# Altium PCB PCB1.PcbDoc
Units mm, origin at the board's own origin, x right, y up, seen from the top; angles counter-clockwise.
Board outline 100 x 100 mm, 2 copper layers (Top Layer, Bottom Layer); 42 components, 8 nets, 132 pads, 2 vias.
Unrouted connection lines stored in the file: 118.
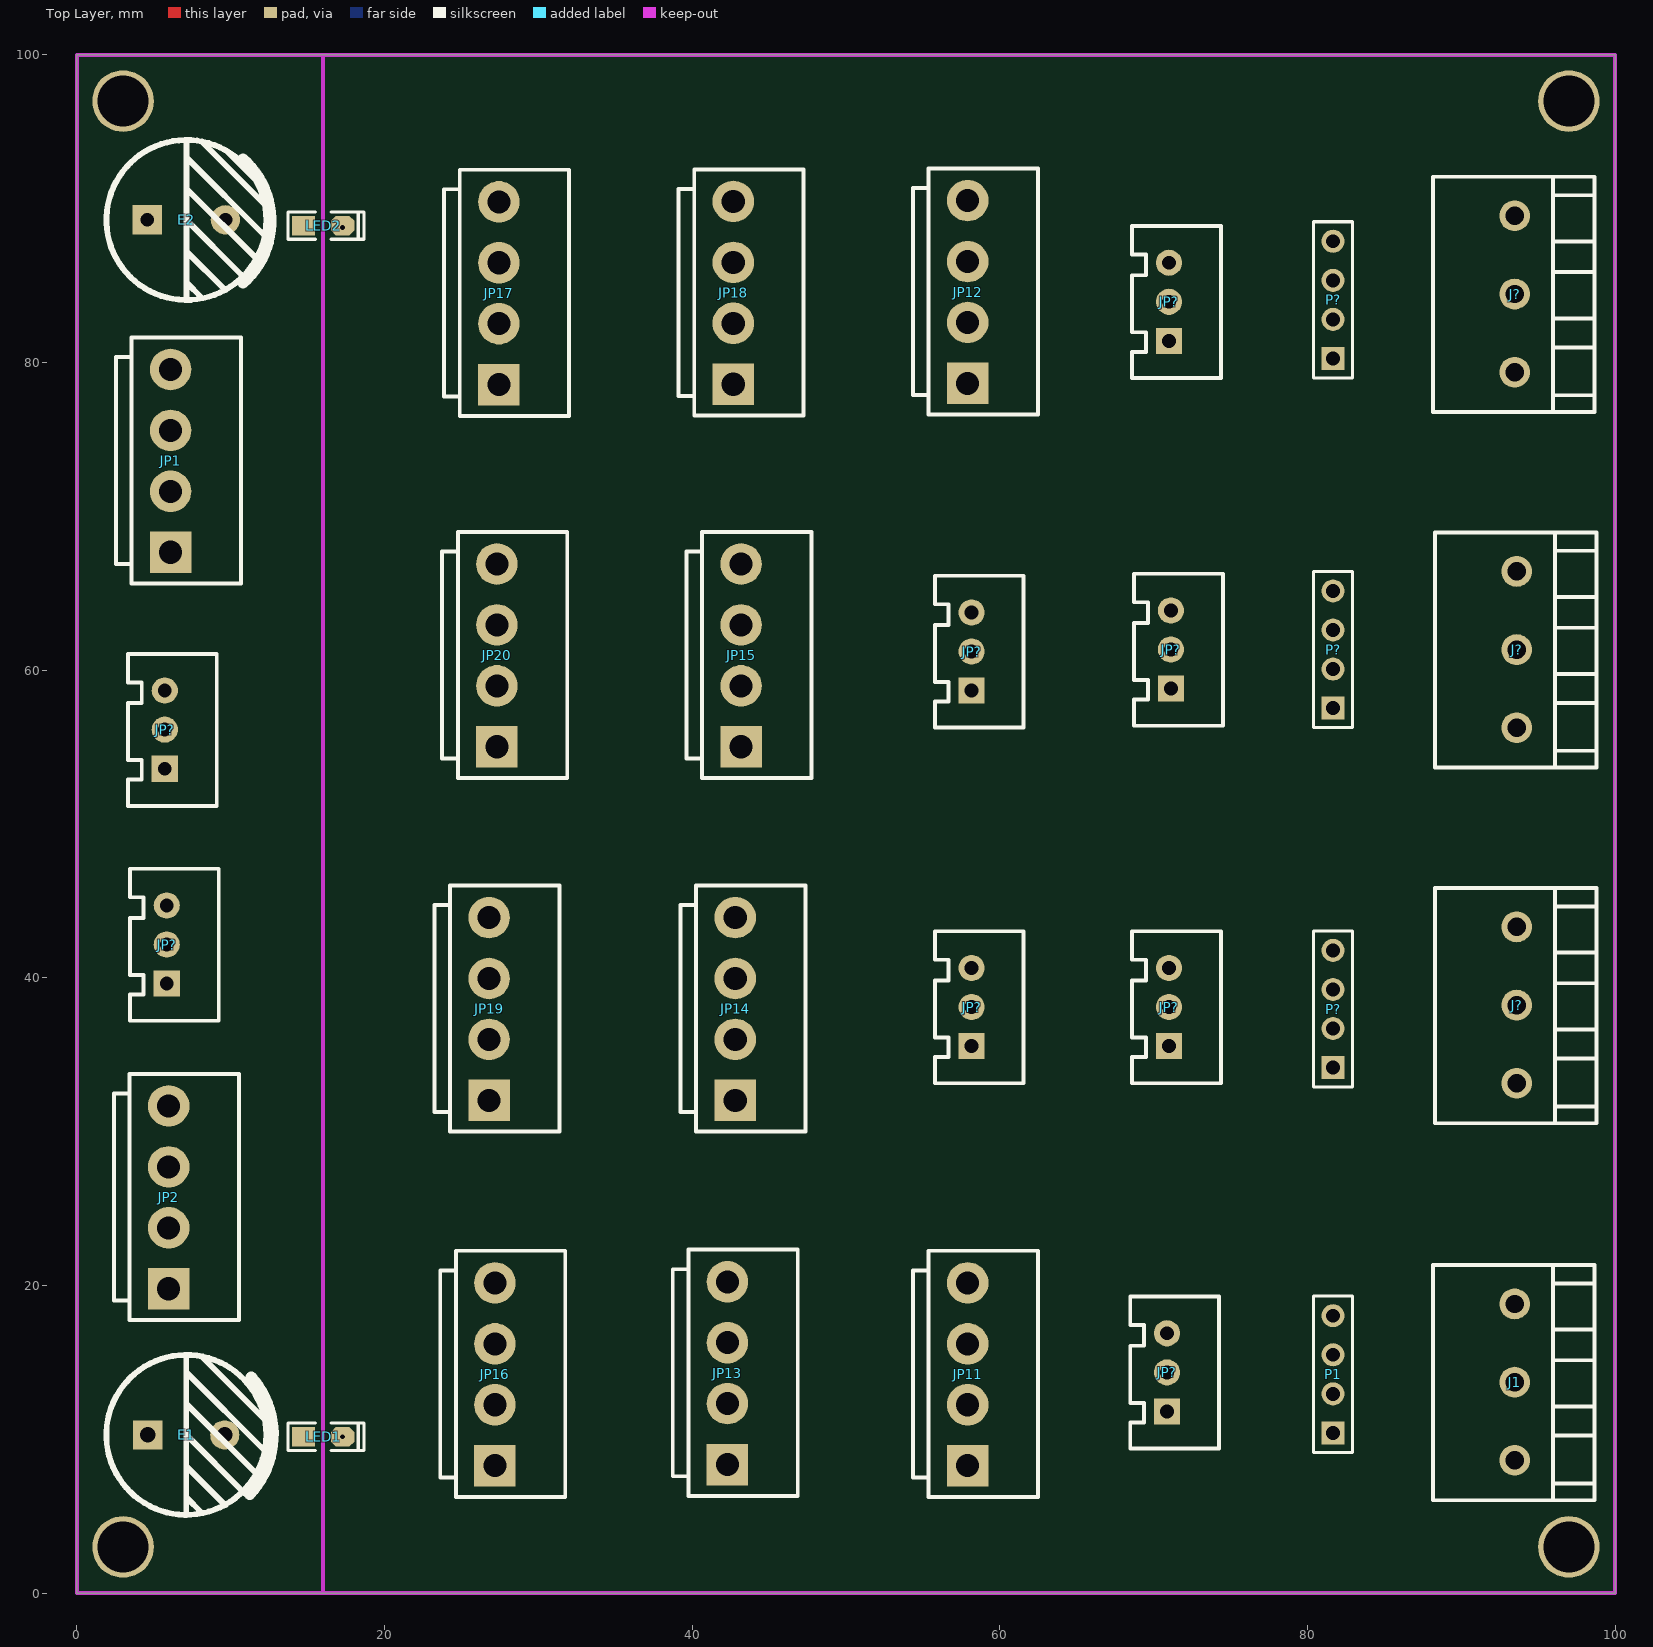
[diagram p0: Top Layer view]
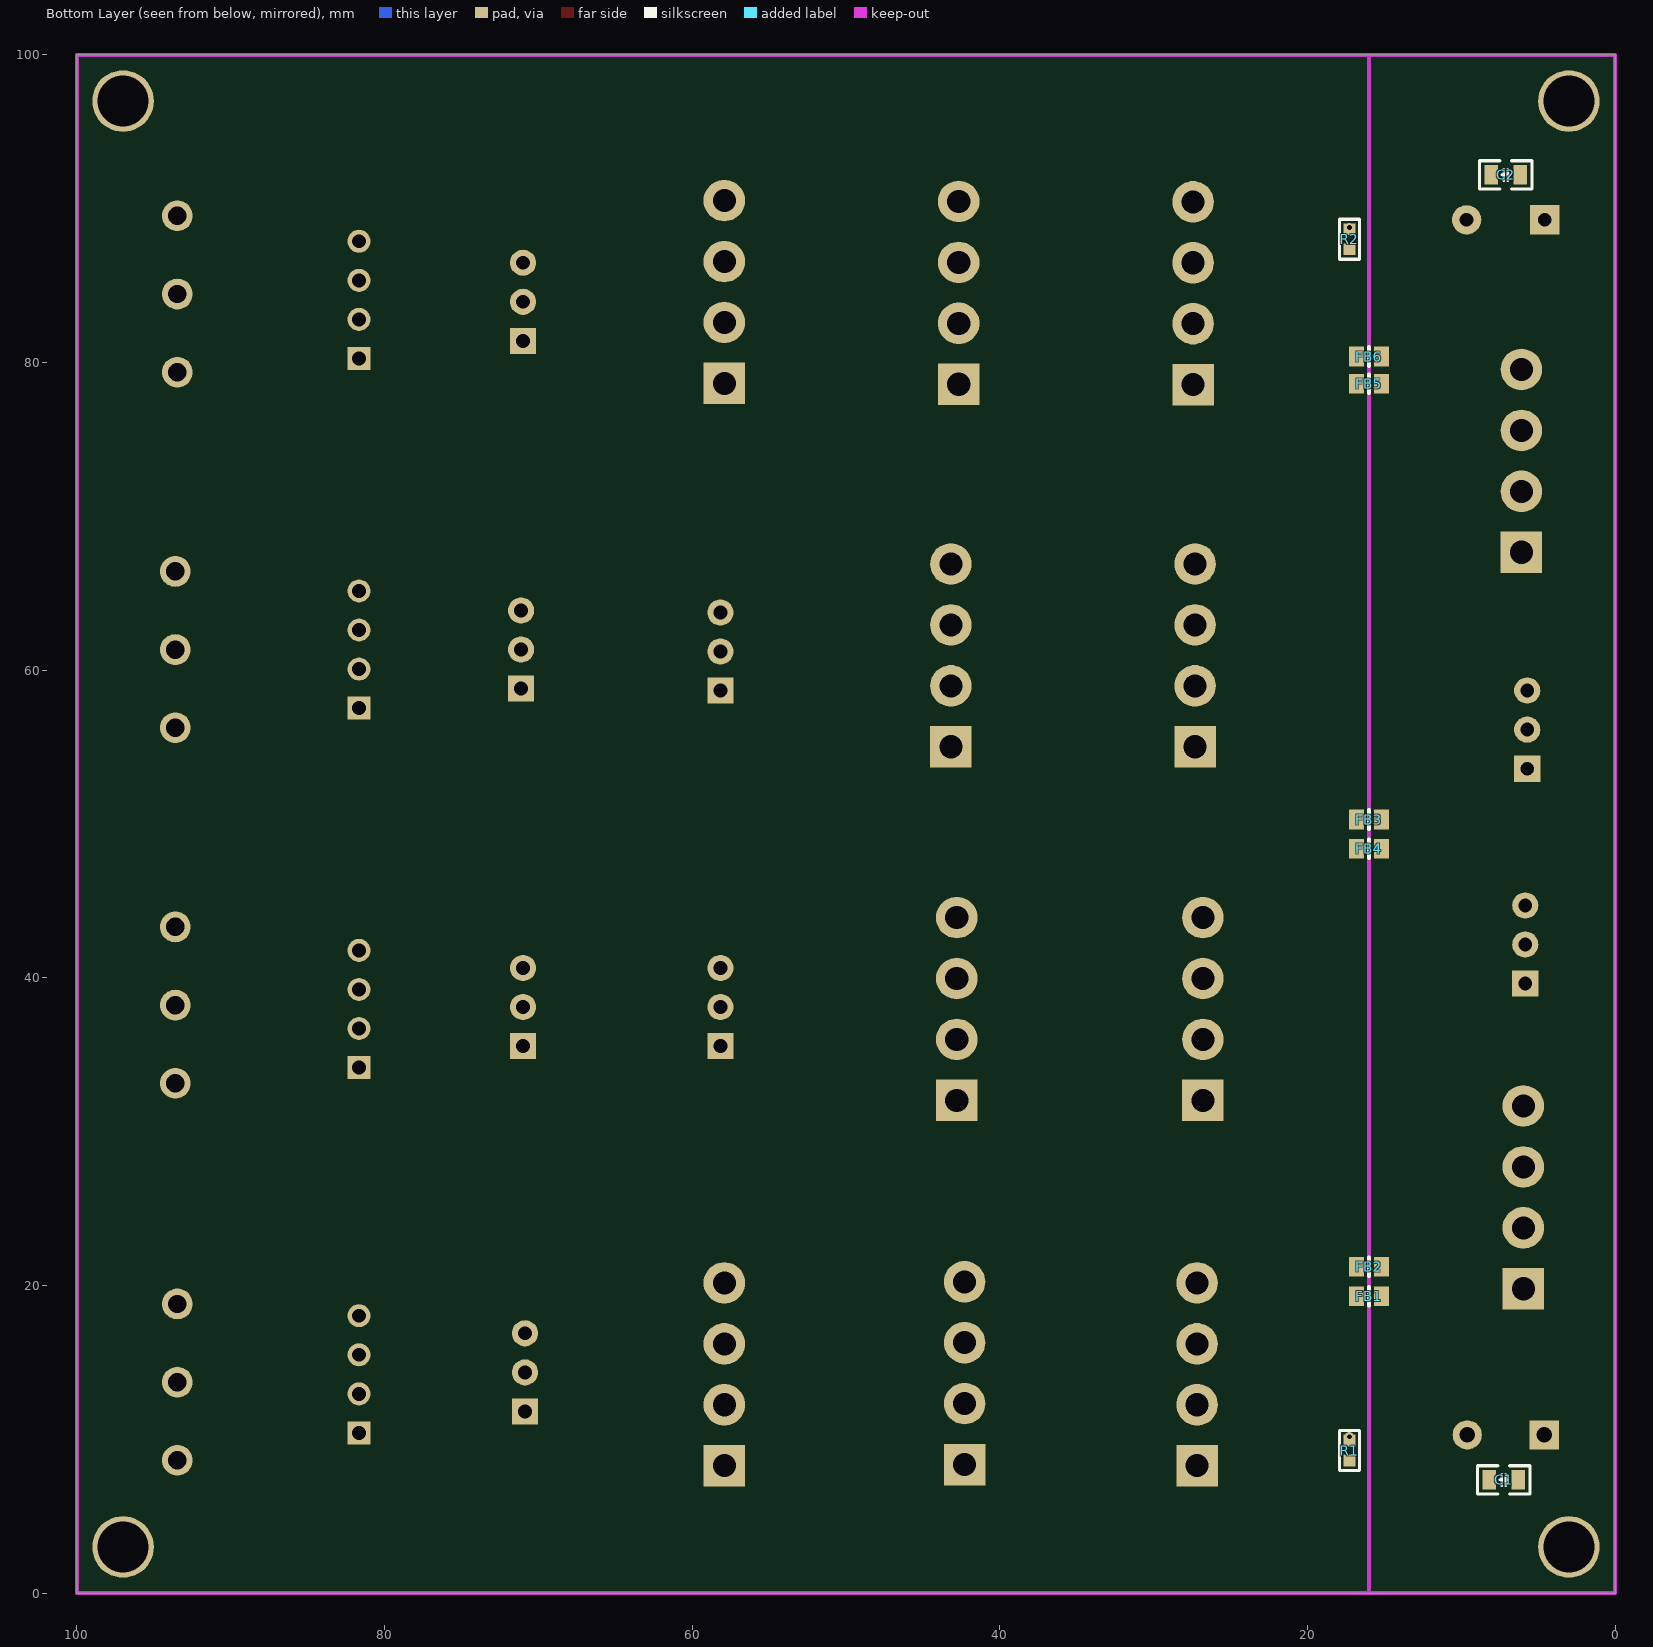
[diagram p1: Bottom Layer view, seen from below]

## Layer stack, top to bottom
Top Solder: solder mask 0.0102, Solder Resist, Dk 3.5
Top Layer: signal copper 0.0356
Dielectric 1: dielectric 0.32, FR-4, Dk 4.8
Bottom Layer: signal copper 0.0356
Bottom Solder: solder mask 0.0102, Solder Resist, Dk 3.5

## Board outline
0,0 100,0 100,100 0,100

## Design rules (kind name [scope] priority, off if disabled: settings)
Clearance [All] p1: gap=0.254 ignorepadtopadclearanceinfootprint=FALSE except(0: Arc-Hole Track-Hole SMDPad-Hole THPad-Hole Via-Hole Fill-Hole Poly-Hole Region-Hole Text-Hole)
PolygonConnect [All] p1: connectstyle=Relief reliefconductorwidth=0.254 reliefentries=4 polygonreliefangle="90 Angle" airgapwidth=0.254
RoutingVias [All] p1: holewidth=0.711 width=1.27 viastyle="Through Hole" minholewidth=0.711 minwidth=1.27 maxholewidth=0.711 maxwidth=1.27
SolderMaskExpansion [All] p1: expansion=0.102
Width [All] p1: maxlimit=0.254 minlimit=0.254 preferedwidth=0.254
30 further rules are at their usual default settings.

## Classes and differential pairs
component class Sheet1: C1 C2 E1 E2 FB1 FB2 FB3 FB4 FB5 FB6 J1 J? JP1 JP2 JP11 JP12 JP13 JP14 JP15 JP16 JP17 JP18 JP19 JP20 JP? LED1 LED2 P1 P? R1 R2

## Components (designator, comment, footprint, x,y, rotation, side; value= is the part's Value field where it differs from the comment)
C1 "104" "C 0805_L" 7.239,7.366 r0 bottom locked
C2 "104" "C 0805_L" 7.112,92.202 r0 bottom locked
E1 "10uF/35V" "CAP 5.0*10*12.5" 7.112,10.287 r0 top locked
E2 "10uF/35V" "CAP 5.0*10*16" 7.112,89.281 r0 top locked
FB1 "600R" FB-0805 16.002,19.304 r0 bottom locked
FB2 "600R" FB-0805 16.002,21.209 r0 bottom locked
FB3 "600R" FB-0805 16.002,50.292 r0 bottom locked
FB4 "600R" FB-0805 16.002,48.387 r0 bottom locked
FB5 "600R" FB-0805 16.002,78.613 r0 bottom locked
FB6 "600R" FB-0805 16.002,80.391 r0 bottom locked
J1 "接线座-3P" KF128-5.08-3P 93.472,18.796 r90 top locked
J? "接线座-3P" KF128-5.08-3P 93.599,43.307 r90 top locked
J? "接线座-3P" KF128-5.08-3P 93.599,66.421 r90 top locked
J? "接线座-3P" KF128-5.08-3P 93.472,89.535 r90 top locked
JP1 "HDR-1X4" VH3.96-LI-4P 6.096,73.606 r90 top locked
JP2 "HDR-1X4" VH3.96-LI-4P 5.969,25.727 r90 top locked
JP11 "HDR-1X4" VH3.96-LI-4P 57.912,14.224 r90 top locked
JP12 "HDR-1X4" VH3.96-LI-4P 57.912,84.582 r90 top locked
JP13 "HDR-1X4" VH3.96-LI-4P 42.291,14.297 r90 top locked
JP14 "HDR-1X4" VH3.96-LI-4P 42.799,37.973 r90 top locked
JP15 "HDR-1X4" VH3.96-LI-4P 43.18,60.96 r90 top locked
JP16 "HDR-1X4" VH3.96-LI-4P 27.178,14.224 r90 top locked
JP17 "HDR-1X4" VH3.96-LI-4P 27.432,84.505 r90 top locked
JP18 "HDR-1X4" VH3.96-LI-4P 42.672,84.528 r90 top locked
JP19 "HDR-1X4" VH3.96-LI-4P 26.797,37.973 r90 top locked
JP20 "HDR-1X4" VH3.96-LI-4P 27.305,60.96 r90 top locked
JP? "HDR-1X3" XH2.54-LI-3P 5.842,42.164 r90 top locked
JP? "HDR-1X3" XH2.54-LI-3P 5.715,56.134 r90 top locked
JP? "HDR-1X3" XH2.54-LI-3P 70.993,83.947 r90 top locked
JP? "HDR-1X3" XH2.54-LI-3P 58.166,61.214 r90 top locked
JP? "HDR-1X3" XH2.54-LI-3P 58.166,38.1 r90 top locked
JP? "HDR-1X3" XH2.54-LI-3P 70.866,14.351 r90 top locked
JP? "HDR-1X3" XH2.54-LI-3P 70.993,38.1 r90 top locked
JP? "HDR-1X3" XH2.54-LI-3P 71.12,61.341 r90 top locked
LED1 "红色" "LED 0805G" 16.002,10.16 r0 top locked
LED2 "蓝色" "LED 0805G" 16.002,88.9 r0 top locked
P1 "Header 4" HDR1X4 81.661,10.414 r90 top locked
P? "Header 4" HDR1X4 81.661,34.163 r90 top locked
P? "Header 4" HDR1X4 81.661,80.264 r90 top locked
P? "Header 4" HDR1X4 81.661,57.531 r90 top locked
R1 "1K" "R 0603_L" 17.272,9.271 r270 bottom locked
R2 "1K" "R 0603_L" 17.272,88.011 r270 bottom locked

## Footprints (in the part's own frame and the unit in brackets; to place one, negate y for a bottom-side part, rotate by r counter-clockwise, add the part's x,y. Pads: shape width x height; smd on the part's side, far side on the other; paste and mask are expansions set on the pad)
"C 0805_L" [mil] "无极性贴片电容"
  rect 35x50 smd: 1(-37.4,0) 2(37.4,0)
  silkscreen extent -67,-36 67,36, body extent -39,-24 39,24, height 20
"CAP 5.0*10*12.5" [mm] "脚距5mm直径10mm高度12.5mm"
  rect 1.9x1.9 hole 1: 1(-2.5,0)
  round 1.9 hole 1: 2(2.5,0)
  silkscreen extent -5.2,-5.21 5.64,5.2, body extent -5,-5.01 5.01,4.99, height 12.55
"CAP 5.0*10*16" [mm] "脚距5mm直径10mm高度16mm"
  rect 1.9x1.9 hole 0.9: 1(-2.54,0)
  round 1.9 hole 0.9: 2(2.54,0)
  silkscreen extent -5.19,-5.21 5.5,5.19, body extent -5,-5 5.01,5, height 16.04
FB-0805 [mm]
  rect 1x1.27 smd: 1(-0.813,0) 2(0.813,0)
  silkscreen extent 0,-0.61 0,0.61, body extent -1.03,-0.64 1.03,0.64, height 0.71
HDR1X4 [mm] "Connector; Header; 4 Position"
  rect 1.5x1.5 hole 0.9: 1(0,0)
  round 1.5 hole 0.9: 2(2.54,0) 3(5.08,0) 4(7.62,0)
  silkscreen extent -1.27,-1.27 8.89,1.27
KF128-5.08-3P [mm]
  round 2 hole 1.2: 1(-10.16,0) 2(-5.08,0) 3(0,0)
  silkscreen extent -12.76,-5.2 2.54,5.3, body extent -12.66,-5.1 2.34,5.2, height 14.1
"LED 0805G" [mil] "绿色0805LED"
  rect 60x50 smd: 1(-50,0)
  oct 60x50 smd: 2(50,0)
  silkscreen extent -90,-35 105,35, body extent -39,-25 39,25, height 32
"R 0603_L" [mil] "1/10W贴片电阻"
  rect 30x30 smd: 1(-25.59,0) 2(25.59,0)
  silkscreen extent -51,-26 51,26, body extent -31,-16 31,16, height 16
VH3.96-LI-4P [mm] "接插件，25V/5A"
  rect 2.7x2.7 hole 1.5: 1(-5.94,0)
  round 2.7 hole 1.5: 2(-1.978,0) 3(1.982,0) 4(5.942,0)
  silkscreen extent -7.97,-4.57 8.03,3.56, body extent -7.94,-4.4 7.99,4.16, height 10.5
XH2.54-LI-3P [mm] "接插件，3P"
  rect 1.7x1.7 hole 0.9: 1(-2.54,0)
  round 1.7 hole 0.9: 2(0,0) 3(2.54,0)
  silkscreen extent -4.95,-3.38 4.93,2.39, body extent -5.04,-3.3 5.04,2.4, height 7.03

## Part data
C1 C2: library part C, "无极性贴片电容", BOM名称=无极性贴片电容, 学习资源=www.ooocke.com, 版权归属=源创客
E1 E2: library part C-CAP, "直插电解电容", BOM名称=直插电解电容, 学习资源=www.ooocke.com, 版权归属=源创客
FB1 FB2 FB3 FB4 FB5 FB6: library part FB
JP1 JP2 JP11 JP12 JP13 JP14 JP15 JP16 JP17 JP18 JP19 JP20: library part "Header 4", "4P接插件", BOM名称=4P接插件, 学习资源=www.ooocke.com, 版权归属=源创客
JP? JP? JP? JP? JP? JP? JP? JP?: library part "Header 3", "3P接插件", BOM名称=3P接插件, 学习资源=www.ooocke.com, 版权归属=源创客
LED1 LED2: library part LED-SMD, "贴片LED", BOM名称=贴片LED, 学习资源=www.ooocke.com, 版权归属=源创客
P1 P? P? P?: "Header, 4-Pin", LatestRevisionDate=17-Jul-2002, LatestRevisionNote="Re-released for DXP Platform.", Publisher="Altium Limited"
R1 R2: library part R, "贴片电阻", BOM名称=贴片电阻, 学习资源=www.ooocke.com, 版权归属=源创客

## Free pads (board coordinates)
  round 4 hole 3.3: 12(3,3) 12(3,97) 12(97,3) 12(97,97)

## Via types
v1: diameter 0.61, hole 0.305, Top Layer to Bottom Layer, 2 vias

## Nets (pads, with @x,y where several pads share a name; then routed paths per layer and width w, separated by ;. In a path a pad name is that pad's centre, name@x,y a point inside that pad or via, vN(x,y) a via of type N, cw(c..) or ccw(c..) an arc to the next point about the centre after c; other vN are vias at no path point)
GND: FB3.2 FB4.2 J1.2 J?.2 JP11.2 JP11.3 JP12.2 JP12.3 JP13.2 JP13.3 JP14.2 JP14.3 JP15.2 JP15.3 JP16.2 JP16.3 JP17.2 JP17.3 JP18.2 JP18.3 JP19.2 JP19.3 JP20.2 JP20.3 JP?.2@58.166,38.1 JP?.2@58.166,61.214 JP?.2@70.866,14.351 JP?.2@70.993,38.1 JP?.2@70.993,83.947 JP?.2@71.12,61.341 P1.2 P1.3 P?.2 P?.3
GNDin: C1.2 C2.1 E1.2 E2.1 FB3.1 FB4.1 JP1.2 JP1.3 JP2.2 JP2.3 JP?.2@5.715,56.134 JP?.2@5.842,42.164 LED2.1 R1.2
NetLED1_2: LED1.2 R1.1
  other v1: 17.272,10.16
NetLED2_2: LED2.2 R2.1
  other v1: 17.272,88.773
VCC: FB1.2 FB2.2 J1.1 J?.1 JP11.1 JP12.1 JP13.1 JP14.1 JP15.1 JP16.1 JP17.1 JP18.1 JP19.1 JP20.1 JP?.1@58.166,35.56 JP?.1@58.166,58.674 JP?.1@70.866,11.811 JP?.1@70.993,35.56 JP?.1@70.993,81.407 JP?.1@71.12,58.801 P1.1 P?.1
VCCin: C1.1 E1.1 FB1.1 FB2.1 JP1.1 JP2.1 JP?.1@5.715,53.594 JP?.1@5.842,39.624 LED1.1
VEE: FB5.2 FB6.2 J1.3 J?.3 JP11.4 JP12.4 JP13.4 JP14.4 JP15.4 JP16.4 JP17.4 JP18.4 JP19.4 JP20.4 JP?.3@58.166,40.64 JP?.3@58.166,63.754 JP?.3@70.866,16.891 JP?.3@70.993,40.64 JP?.3@70.993,86.487 JP?.3@71.12,63.881 P1.4 P?.4
VEEin: C2.2 E2.2 FB5.1 FB6.1 JP1.4 JP2.4 JP?.3@5.715,58.674 JP?.3@5.842,44.704 R2.2

## Keep-outs
Top Layer:
  lines w0.254: 16.002,0.127 16.002,99.949
Bottom Layer:
  lines w0.254: 16.002,0.127 16.002,99.949
Keep-Out Layer:
  the board outline again, w0.254